# Altium PCB RX.PcbDoc
Units mil, origin at the board's own origin, x right, y up, seen from the top; angles counter-clockwise.
Board outline 1102.36 x 2007.87 mil, 2 copper layers (Top Layer, Bottom Layer); 28 components, 16 nets, 73 pads, 7 vias.
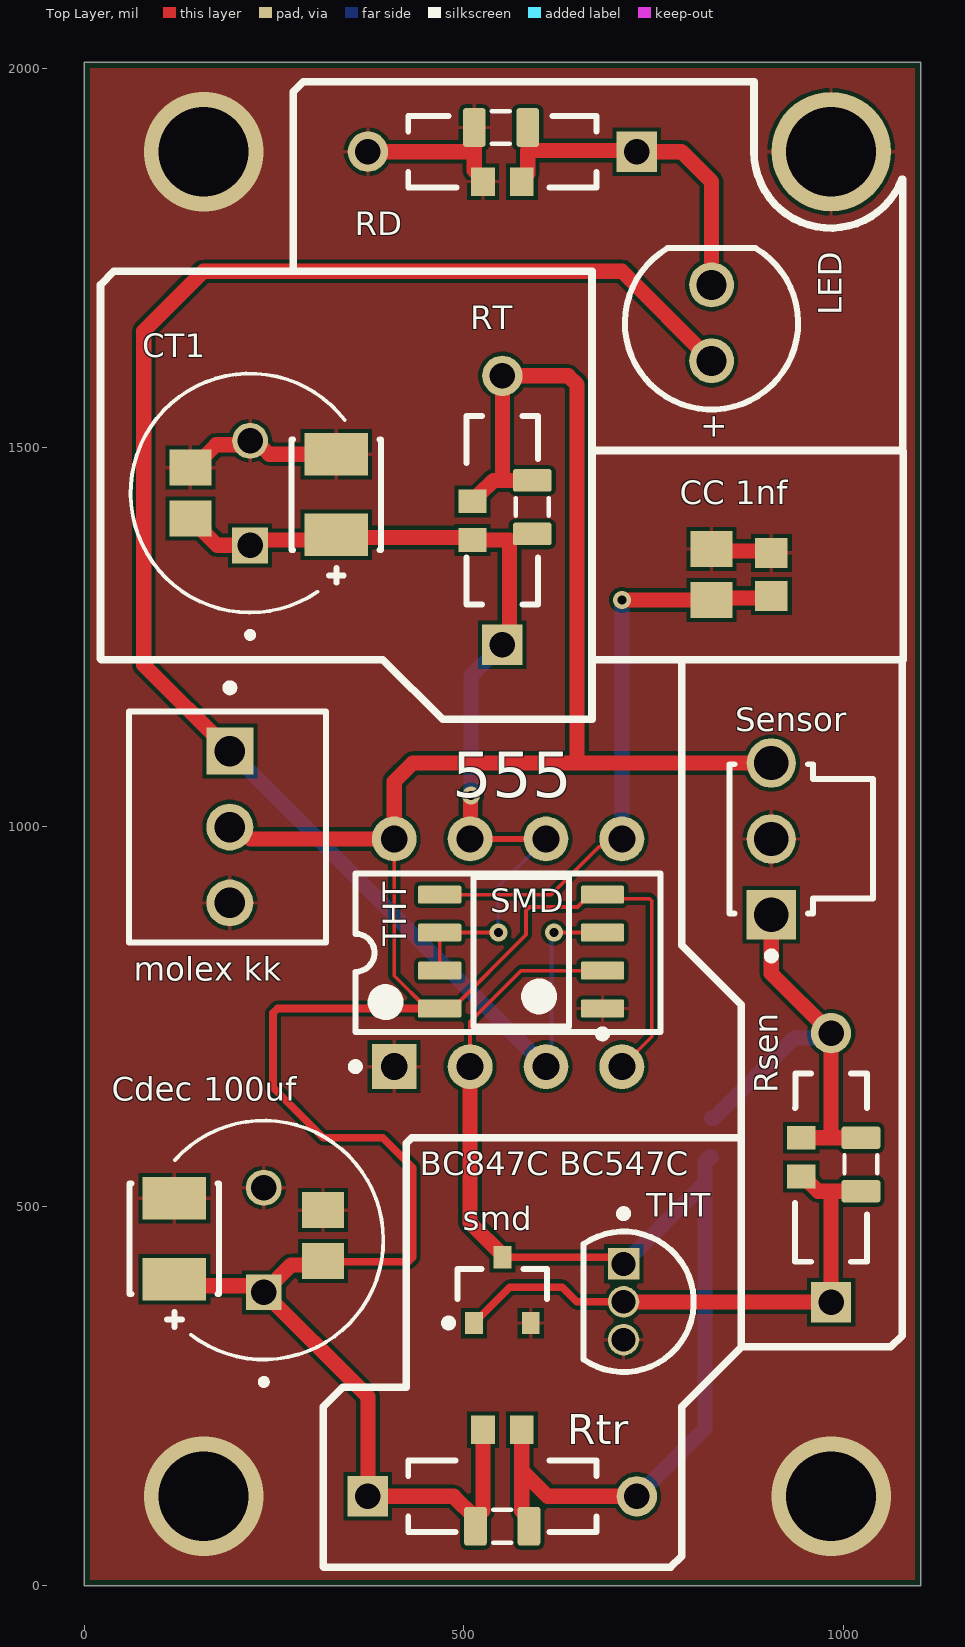
[diagram p0: Top Layer view]
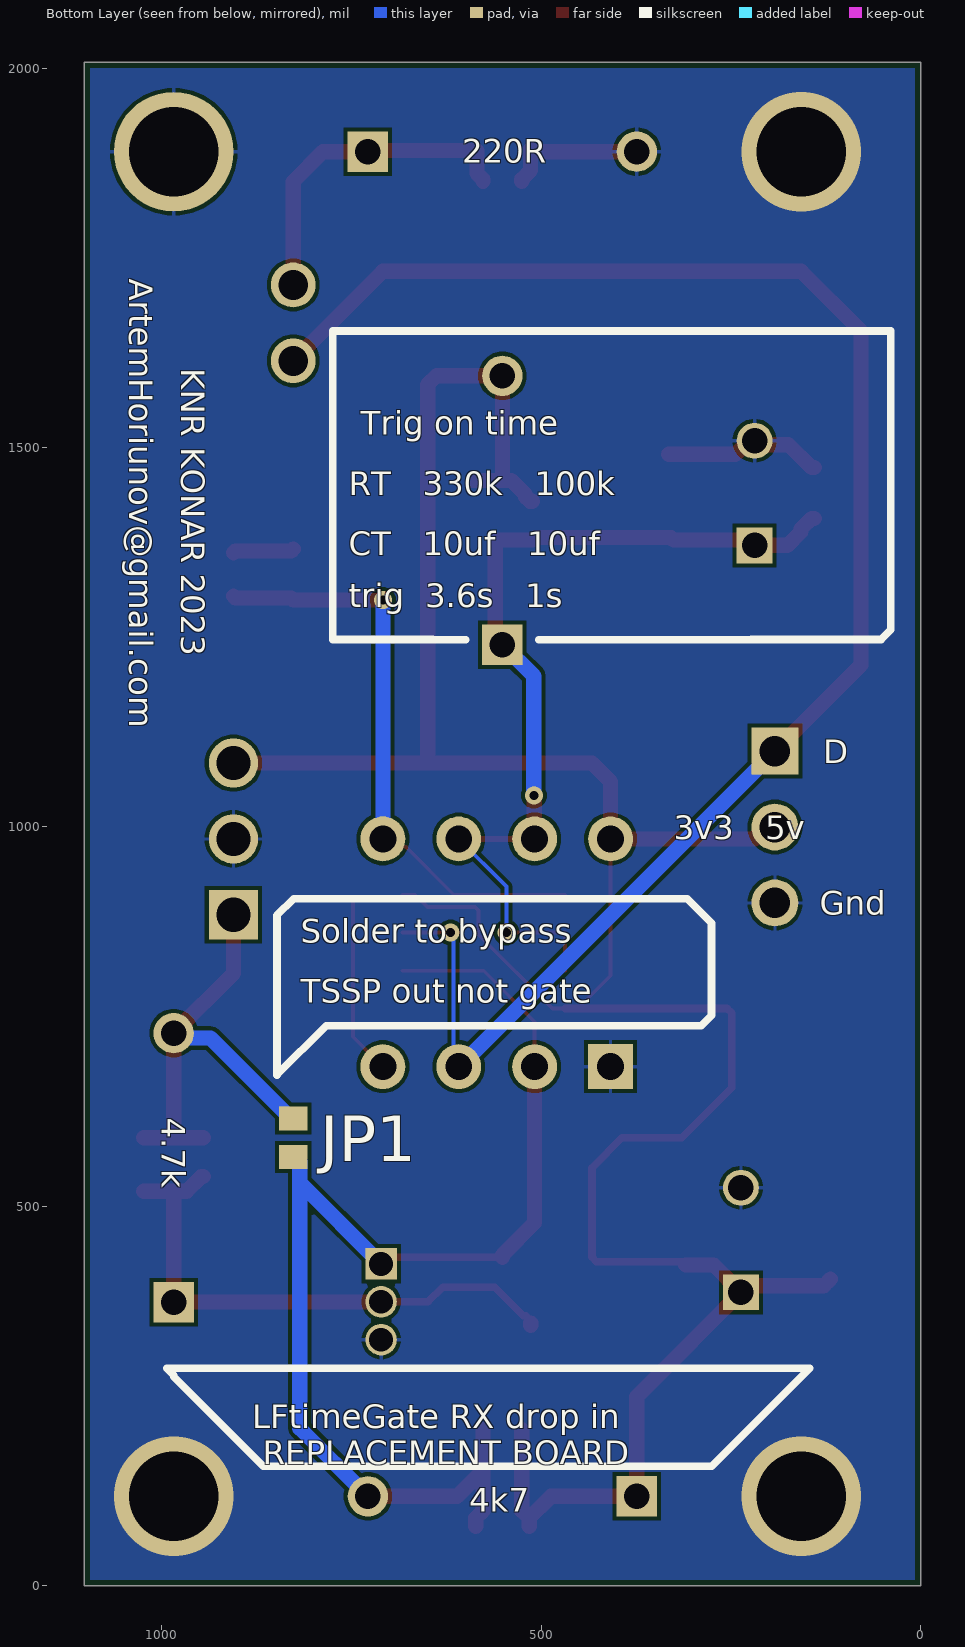
[diagram p1: Bottom Layer view, seen from below]
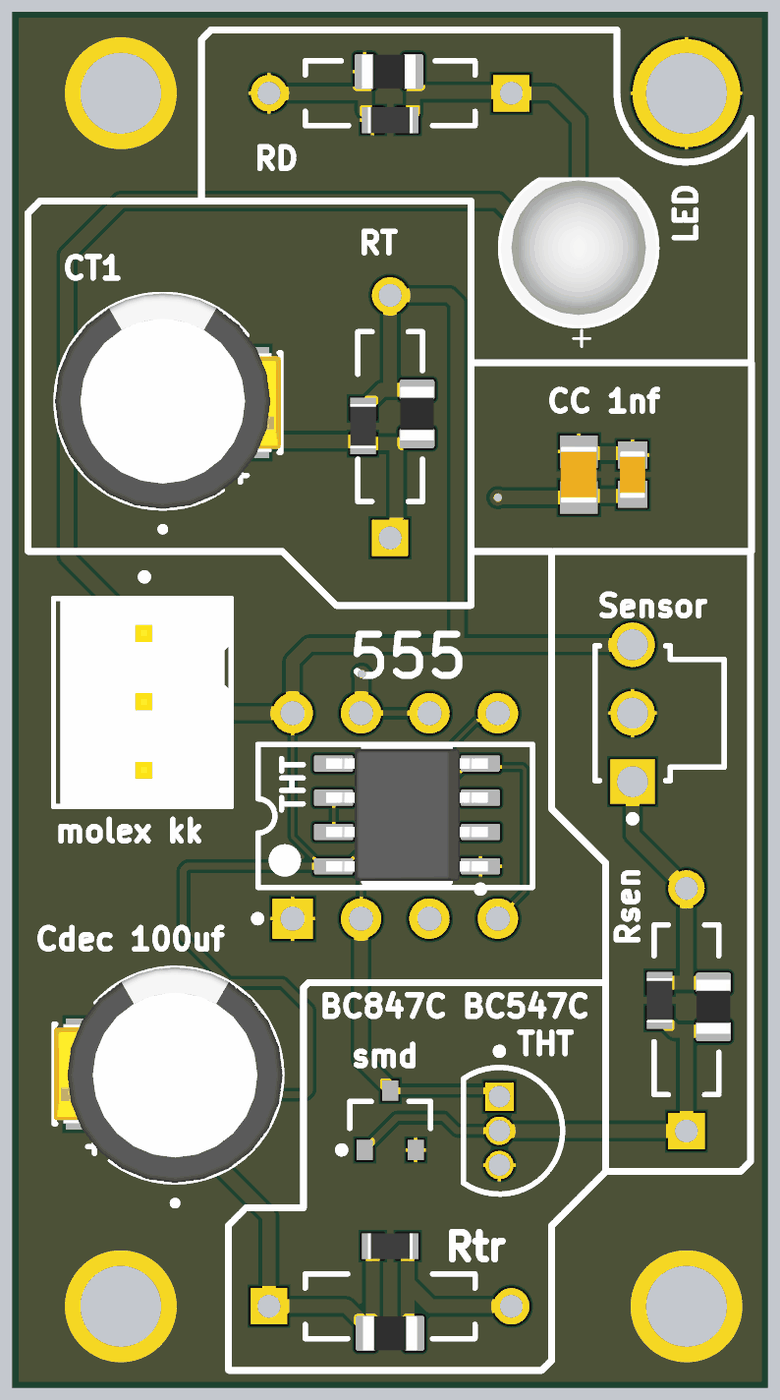
[diagram p2: 3D render of the assembled board from above, using the file's embedded part models]

## Layer stack, top to bottom
Top Solder: solder mask 0.4, Solder Resist, Dk 3.5
Top Layer: signal copper 1.4
Dielectric 1: dielectric 12.6, FR-4, Dk 4.8
Bottom Layer: signal copper 1.4
Bottom Solder: solder mask 0.4, Solder Resist, Dk 3.5

## Board outline
0,0 1102.36,0 1102.36,2007.87 0,2007.87

## Design rules (kind name [scope] priority, off if disabled: settings)
BoardOutlineClearance [All] p1: gap=7.87 ignorepadtopadclearanceinfootprint=FALSE
Clearance [All] p1: gap=5 ignorepadtopadclearanceinfootprint=FALSE except(9.84: Arc-Hole Track-Hole SMDPad-Hole THPad-Hole Via-Hole Fill-Hole Poly-Hole Region-Hole Text-Hole)
ComponentClearance [All] p1: gap=5 collisioncheckmode=3 verticalgap=5 showdistances=TRUE
DiffPairsRouting [All] p1: maxlimit=10 minlimit=5 mostfreqgap=5 toplayer_minwidth=5 toplayer_maxwidth=1000 toplayer_prefwidth=5 bottomlayer_minwidth=5 bottomlayer_maxwidth=1000 bottomlayer_prefwidth=5 maxuncoupledlength=500
Height [All] p1: minheight=0 maxheight=71497.94 prefheight=500
HoleSize [All] p1: absolutevalues=TRUE maxlimit=248.03 minlimit=11.81 maxpercent=80.000 minpercent=20.000
HoleToHoleClearance [All] p1: gap=9.84 allowstackedmicrovias=FALSE
MinimumAnnularRing [All] p1: minimumring=3
MinimumSolderMaskSliver [All] p1: minsoldermaskwidth=0
PlaneClearance [All] p1: clearance=5
PlaneConnect PlaneConnectPowerPads [InPadClass('PowerPads')] p1: planeconnectstyle=Direct reliefexpansion=20 reliefentries=4 reliefconductorwidth=10 reliefairgap=10
PlaneConnect [All] p2: pad.planeconnectstyle=Relief pad.reliefexpansion=11.81 pad.reliefentries=4 pad.reliefconductorwidth=5 pad.reliefairgap=5 via.planeconnectstyle=Direct via.reliefexpansion=11.81 via.reliefentries=4 via.reliefconductorwidth=5 via.reliefairgap=5
PolygonConnect PolygonConnectPowerPads [All vs (InPadClass('PowerPads'))] p1: connectstyle=Direct reliefconductorwidth=10 reliefentries=4 polygonreliefangle="90 Angle" airgapwidth=10
PolygonConnect [All] p2: thpad.connectstyle=Relief thpad.reliefconductorwidth=5 thpad.reliefentries=4 thpad.polygonreliefangle="90 Angle" thpad.airgapwidth=5 smdpad.connectstyle=Relief smdpad.reliefconductorwidth=5 smdpad.reliefentries=4 smdpad.polygonreliefangle="90 Angle" smdpad.airgapwidth=5 via.connectstyle=Direct via.reliefconductorwidth=5 via.reliefentries=4 via.polygonreliefangle="90 Angle" via.airgapwidth=5
RoutingVias [All] p1: holewidth=11.81 width=23.62 viastyle="Through Hole" minholewidth=11.81 minwidth=23.62 maxholewidth=23.62 maxwidth=259.84
SilkToSilkClearance [All] p1: silktosilkclearance=0
SilkToSolderMaskClearance [IsPad] p1: minsilkscreentomaskgap=5 clearancetoexposedcopper=TRUE
SolderMaskExpansion [All] p1: expansion=2.95 istentingtop=FALSE
Width [All] p1: maxlimit=1000 minlimit=5 preferedwidth=5 minimp=50.000000 maximp=50.000000 favimp=50.000000
20 further rules are at their usual default settings.

## Classes and differential pairs
component class RX: CT1 Sensor SMD

## Components (designator, comment, footprint, x,y, rotation, side; value= is the part's Value field where it differs from the comment)
CC2 "Capacitor 1 uF +/- 10% 50 V 0805" CAPC2013X135X45NL10T25 826.77,1332.68 r270 top value=0805
"CC 1nf" "Capacitor 1uF +/- 10% 16V 0603" CAPC1608X90X35ML15T15 905.51,1332.68 r270 top value=0603 (schematic designator CC1)
Cdec2 "Tantal" FP-T491B107K006AT-MFG 119.05,457.5 r270 top
Cdec3 "EEUFR1V101" CAPPRD350W60D800H1150 236.84,455.79 r90 top
"Cdec 100uf" "Capacitor 1 uF +/- 10% 50 V 0805" CAPC2013X135X45NL10T25 314.96,461.69 r270 top value=1µF (schematic designator Cdec1)
CT1 "Electrolythic" CAPPRD350W60D800H1150 218.82,1440.01 r90 top
CT2 "Tantal" FP-T491B107K006AT-MFG 332.36,1437.95 r270 top
CT3 "Capacitor 1 uF +/- 10% 50 V 0805" CAPC2013X135X45NL10T25 140.08,1440.01 r270 top value=1µF
JP1 "0603" RESC1609X50X30NL8T20 826.77,590.55 r90 bottom (schematic designator Rbyp)
LED "151053YS04500" WL-TMRW_D5.8H11.7 826.77,1664.2 r90 top (schematic designator D?)
"molex kk" "22-11-2032" FP-22-11-2032-MFG 189.13,999.93 r270 top (schematic designator J1)
RD "1KR5J" RESC0805(2012)_L 549.2,1921.59 r180 top value=0805 (schematic designator RD1)
RD2 "0603" RESC1609X50X30NL8T20 551.18,1850.39 r180 top
RD3 "MFR-25FBF52-10K" RESA60-630X240 551.18,1889.76 r180 top value=tht
Rsen "0603" RESC1609X50X30NL8T20 944.88,564.96 r90 top (schematic designator Rsen2)
Rsen1 "MFR-25FBF52-10K" RESA60-630X240 984.25,551.18 r90 top value=10k
Rsen3 "1KR5J" RESC0805(2012)_L 1023.62,555.51 r90 top value=0805
RT "MFR-25FBF52-10K" RESA60-630X240 551.18,1417.32 r90 top value=10k (schematic designator RT3)
RT1 "1KR5J" RESC0805(2012)_L 590.55,1421.65 r90 top value=0805
RT2 "0603" RESC1609X50X30NL8T20 511.81,1403.54 r90 top
Rtr "1KR5J" RESC0805(2012)_L 551.18,78.74 r0 top value=0805 (schematic designator Rtr1)
Rtr2 "MFR-25FBF52-10K" RESA60-630X240 551.18,118.11 r0 top value=10k
Rtr3 "0603" RESC1609X50X30NL8T20 551.18,205.8 r0 top
Sensor "TSOP38238" VISH-TSOP38238 905.51,984.25 r90 top
smd "BC847C" INF-SOT23_L 551.18,389.76 r90 top (schematic designator TRsmd)
SMD "NE555DR" D0008A_N 575.83,835.81 r180 top
THT "NE555P" P0008A 558.66,834.25 r90 top
THT "BC547CG" ONSC-TO-92-3-29-11 710.87,374.42 r270 top (schematic designator TRtht)

## Footprints (in the part's own frame and the unit in brackets; to place one, negate y for a bottom-side part, rotate by r counter-clockwise, add the part's x,y. Pads: shape width x height; smd on the part's side, far side on the other; paste and mask are expansions set on the pad)
CAPC1608X90X35ML15T15 [mm] "Chip Capacitor, 2-Leads, Body 1.75x0.95mm, IPC Low Density"
  rect 1x1.1 smd: 1(-0.725,0) 2(0.725,0)
  body extent -0.87,-0.48 0.87,0.48, height 0.9
CAPC2013X135X45NL10T25 [mm] "Chip Capacitor, 2-Leads, Body 2.10x1.35mm, IPC Medium Density"
  rect 1.2x1.4 smd: 1(-0.85,0) 2(0.85,0)
  body extent -1.05,-0.67 1.05,0.67, height 1.35
CAPPRD350W60D800H1150 [mm]
  round 1.2 hole 0.85: N(1.75,0)
  rect 1.2x1.2 hole 0.85: P(-1.75,0)
  silkscreen extent -4.85,-4 4,2.97, body extent -4,-4 4,4, height 11.5
D0008A_N [mm] "SOIC, 8-Leads, Body 5x4mm, Pitch 1.27mm, IPC Medium Density"
  rrect17% 1.45x0.6 smd: 1(-2.725,1.905) 2(-2.725,0.635) 3(-2.725,-0.635) 4(-2.725,-1.905) 5(2.725,-1.905) 6(2.725,-0.635) 7(2.725,0.635) 8(2.725,1.905)
  silkscreen extent -2.85,-2.5 1.6,2.88, body extent -3,-2.45 3,2.45, height 1.63
FP-22-11-2032-MFG [mm]
  rect 1.57x1.57 hole 1.02 paste-2539.97 mask+0: 1(-2.54,0.075)
  round 1.57 hole 1.02 paste-2539.97 mask+0: 2(0,0.075) 3(2.54,0.075)
  silkscreen extent -4.78,-3.3 3.86,3.3, body extent -3.96,-3.4 3.96,3.4, height 0.25
FP-T491B107K006AT-MFG [mm]
  rect 1.42x2.13 smd paste+0 mask+0: 1(-1.35,0) 2(1.35,0)
  silkscreen extent -1.85,-1.5 2.95,1.5, body extent -2.18,-1.62 2.18,1.62, height 0.25
INF-SOT23_L [mm] "SOT23, 3-Leads, Body 2.9x1.3 mm, Pitch 0.95 mm, IPC High Density"
  rect 0.75x0.6 smd: 1(-1.1,0.95) 2(-1.1,-0.95) 3(1.1,0)
  silkscreen extent -1.22,-1.5 0.7,1.92, body extent -0.7,-1.5 0.7,1.5, height 1.1
ONSC-TO-92-3-29-11 [mm] "TO, 3-Leads, Body Dia 4.7mm, Pitch 1.27mm"
  rect 1.05x1.05 hole 0.8: 1(-1.27,0)
  round 1.05 hole 0.8: 2(0,0) 3(1.27,0)
  silkscreen extent -3.07,-1.34 2.35,2.35, body extent -2.35,-1.33 2.36,2.36, height 7.87
P0008A [mm] "DIP, 8-Leads, Body 10.15x6.6mm, Pitch 2.54mm"
  rect 1.5x1.5 hole 0.9: 1(-3.81,3.81)
  round 1.5 hole 0.9: 2(-3.81,1.27) 3(-3.81,-1.27) 4(-3.81,-3.81) 5(3.81,-3.81) 6(3.81,-1.27) 7(3.81,1.27) 8(3.81,3.81)
  silkscreen extent -3.93,-5.1 2.65,5.23, body extent -3.95,-5.07 3.95,5.07, height 5.08
RESA60-630X240 [mm] "Axial Resistor, 2-Leads, Dia 2.4mm, Body Length 6.3mm"
  rect 1.35x1.35 hole 0.85: 1(-4.5,0)
  round 1.35 hole 0.85: 2(4.5,0)
  silkscreen extent -3.15,-1.2 3.15,1.2, body extent -4.77,-1.19 4.77,1.2, height 2.4
RESC0805(2012)_L [mm] "Chip Resistor, Body 2.0x1.3mm, IPC High Density"
  rrect25% 0.76x1.3 smd: 1(-0.9,0) 2(0.89,0)
  silkscreen extent -0.3,-0.55 0.3,0.55, body extent -1,-0.62 1,0.63, height 0.6
RESC1609X50X30NL8T20 [mm] "Chip Resistor, 2-Leads, Body 1.65x0.95mm, IPC Medium Density"
  rect 0.8x0.95 smd: 1(-0.65,0) 2(0.65,0)
  body extent -0.82,-0.48 0.82,0.48, height 0.5
VISH-TSOP38238 [mm] "TH, 3-Leads, Body 5.00x4.80mm, Pitch 2.54mm"
  rect 1.65x1.65 hole 1.15: 1(-2.54,0)
  round 1.65 hole 1.15: 2(0,0) 3(2.54,0)
  silkscreen extent -4.04,-3.4 2.5,1.4, body extent -2.89,-3.4 2.89,1.4, height 8.55
WL-TMRW_D5.8H11.7 [mm] "THT Mono-color Round LED, 2-leads"
  round 1.5 hole 1: 1(1.27,0) 2(-1.27,0)
  silkscreen extent -2.9,-2.9 2.5,2.9, body extent -2.9,-2.9 2.5,2.9, height 11.7

## Part data
CC2 "Cdec 100uf" CT3: library part CMP-001-00007-6, "Chip Capacitor, 1 uF, +/- 10%, 50 V, 0805 (2012 Metric)", Capacitor Type=Ceramic, Case/Package=0805, Max Operating Temperature=125°C, Min Operating Temperature=-55°C, Tolerance=10%, Voltage rating=50V, Mounting Technology=SM, Pins=2, RoHS Compliant=True
"CC 1nf": library part CMP-001-00004-6, "Chip Capacitor, 1 uF, +/- 10%, 16 V, 0603 (1608 Metric)", Capacitor Type=Ceramic, Case/Package=0603, Max Operating Temperature=125°C, Min Operating Temperature=-55°C, Tolerance=10%, Voltage rating=16V, Mounting Technology=SM, Pins=2, RoHS Compliant=True
Cdec2 CT2: library part CMP-03017-000031-1, "CAP TANT 100UF 10% 6.3V 1411", Capacitance=100uF, Case Code (Imperial)=1411, Case Code (Metric)=3528, Dielectric Material=Tantalum, ESR (Equivalent Series Resistance)=3R, Leakage Current=6.3uA, Max Operating Temperature=125°C, Min Operating Temperature=-55°C, Package Quantity=1, Tolerance=10%, Voltage=6.3V, Voltage Rating (DC)=6V, Case/Package=1411, Depth=2.8mm, Dissipation Factor=15%, Failure Rate=0.001%, Features="General Purpose", Height=1.9mm, Height - Seated (Max)=0.083inch, Lead Free="Lead Free", Length=3.5mm, Life (Hours)=2000Hour, Mount="Surface Mount", Number of Pins=2, Packaging="Tape and Reel", Polarity=Polar, Radiation Hardening=No, REACH SVHC="No SVHC", RoHS Compliant=Yes, Termination=SMD/SMT, Voltage rating=6.3V, Width=2.8mm
Cdec3: "Aluminium Electrolytic Capacitor, Fr Series, 100 - F, - 20%, 35 V, 8 Mm, Radial Leaded", Package="RADIAL-2 Panasonic", Availability="In Stock", Check_prices=https://www.snapeda.com/parts/EEUFR1V101/Panasonic/view-part/2780939/?ref=eda, MF=Panasonic, MP=EEUFR1V101, Price=None, SnapEDA_Link=https://www.snapeda.com/parts/EEUFR1V101/Panasonic/view-part/2780939/?ref=snap
CT1: library part EEUFR1V101, "Aluminium Electrolytic Capacitor, Fr Series, 100 - F, - 20%, 35 V, 8 Mm, Radial Leaded", Package="RADIAL-2 Panasonic", Availability="In Stock", Check_prices=https://www.snapeda.com/parts/EEUFR1V101/Panasonic/view-part/2780939/?ref=eda, MF=Panasonic, MP=EEUFR1V101, Price=None, SnapEDA_Link=https://www.snapeda.com/parts/EEUFR1V101/Panasonic/view-part/2780939/?ref=snap
JP1 RD2 Rsen RT2 Rtr3: library part CMP-2000-03816-5, "Chip Resistor, 0 Ohm, Jumper, 100 mW, -55 to 155 degC, 0603 (1608 Metric), RoHS, Tape and Reel", Manufacturer="Vishay Semiconductor", Max Operating Temperature="155 degC", Min Operating Temperature="-55 degC", Package Quantity=5000, Voltage rating="75 V", ComponentLink1Description="Manufacturer URL", ComponentLink1URL=http://www.vishay.com/, ComponentLink2Description=Datasheet, ComponentLink2URL=http://www.vishay.com/docs/20035/dcrcwe3.pdf, DatasheetVersion=06/2012, Height="0.45 mm", Length="1.55 mm", Mount="Surface Mount", Mounting Technology="Surface Mount", PackageDescription="2-Pin Surface Mount Device, Body 1.575 x 0.85 mm", PackageReference=0603, Packaging="Tape and Reel", Pins=2, REACH SVHC=Unknown, RoHSCompliant=true
LED: library part CMP-1477-00001-2, Case/Package=Radial, Color=Yellow, Forward Current=100mA, Forward Voltage=2.1V, Max Operating Temperature=85°C, Max Reverse Voltage (DC)=5V, Min Operating Temperature=-40°C, Test Current=20mA, Dominant Wavelength=590nm, Height=8.6mm, Length=5mm, Lens Size=5mm, Lens Style="Circular, Clear, Round", Luminous Intensity=1.5cd, Mount="Through Hole", NexarPartId=29717819, Packaging=Bulk, Peak Wavelength=592nm, REACH SVHC=Unknown, RoHS=Compliant, Viewing Angle=45°, Wavelength=590nm, Width=5mm
"molex kk": library part CMP-04776-000113-1, "CONN HEADER VERT 3POS 2.54MM", Current rating=4A, Manufacturer=Molex, Temperature="-40°C to +80°C", Temperature Range High=+80°C, Temperature Range Low=-40°C, Voltage rating=500V, Automotive=No, Category=Conn, ComponentLink2Description=Datasheet, ComponentLink2URL=https://www.molex.com/webdocs/datasheets/pdf/en-us/0022112032_PCB_HEADERS.pdf, Conn Gender=Male, Conn Orientation=Vertical, Contact material=Gold,Nickel, Device Class L1=Connectors, Device Class L2="Headers and Wire Housings", Device Class L3=unset, Digikey Description="CONN HEADER VERT 3POS 2.54MM", Footprint Url=https://www.molex.com/pdm_docs/sd/022112032_sd.pdf, Height=10.91mm, Lead Free=Yes, Manufacturer Part Number=22-11-2032, Mounting Type="Through Hole", Mouser Description="KK® 254 Solid Header, Vertical, with Friction Lock, 3 Circuits, Gold (Au) Plating", Number of Contacts=3, Number of Rows=1, Octopart=https://octopart.com/22-11-2032-molex-10085, Package=22-11-2032, Pitch=2.54mm, RoHS=TRUE
RD Rsen3 RT1 Rtr: library part CMP-009-00076-2, "1K 0.125W 5% 0805 (2012 Metric)  SMD", Case/Package=0805, Power=125mW, Tolerance=5%, Mounting Technology=SMT, Pins=2
RD3 Rsen1 RT Rtr2: library part CMP-009-00047-4, "Axial Resistor, 10 KOhm, +/- 1%, 0.25 W, -55 to 155 degC, 2-Pin THD, RoHS, Bulk", Case/Package=Axial, Manufacturer=Yageo, Max Operating Temperature=155°C, Min Operating Temperature=-55°C, Package Description="2-Pin Axial Lead, Dia 2.4 mm, Body Length 6.3 mm", Package Quantity=200, Package Reference=MFR-25, Power=250mW, Tolerance=1%, Voltage rating=250V, Datasheet URL=http://www.yageo.com/documents/recent/Yageo%20LR_MFR_2013.pdf, Datasheet Version=Apr-13, Manufacturer URL=http://www.yageo.com/, Mounting Technology=TH, Packaging=Bulk, RoHS Compliant=True
Sensor: library part CMP-010-00018-3, "IR Receiver Modules for Remote Control System, 2.5 to 5.5 V, -25 to 85 degC, 3-Pin THD, RoHS, Bulk", Case/Package=Axial, Manufacturer="Vishay Semiconductor", Max Operating Temperature=85°C, Max Supply Voltage=5.5V, Min Operating Temperature=-25°C, Min Supply Voltage=2.5V, Nominal Supply Current=3mA, Output Current=5mA, Package Description="3-Pin Through Hole Device, Body 5.00 x 4.80 mm, Pitch 2.54 mm", Package Quantity=1500, Datasheet URL=http://www.vishay.com/docs/82491/tsop382.pdf, Datasheet Version="Rev. 1.5, 07/2016", Mounting Technology=TH, Package Reference=TSOP38238, Packaging=Bulk, Pins=3, RoHS Compliant=True, Sensor Type=Optical
smd: library part CMP-1177-00037-1, "NPN Silicon AF Transistor, 45 V VCEO, 100 mA IC, SOT23, Reel, Green", Manufacturer=Infineon, ComponentLink1Description="Manufacturer URL", ComponentLink1URL=http://www.infineon.com/, ComponentLink2Description=Datasheet, ComponentLink2URL=http://www.infineon.com/dgdl/bc847series_bc848series_bc849series_bc850series.pdf?folderId=db3a304314dca389011541d30fa21656&fileId=db3a304314dca389011541d4630a1657, ComponentLink3Description="Package Specification", ComponentLink3URL=http://www.infineon.com/dgdl/SOT23-Package_Overview.pdf?folderId=db3a30431936bc4b0119532290053c66&fileId=db3a30431936bc4b0119533468123c85, fT (typ)="250Â MHz", Green=TRUE, IBM (max)="200Â mA", IC (max)="100Â mA", ICBO (max)="15Â nA", ICM (max)="200Â mA", Mounting Technology="Surface Mount", PackageDescription="3-Pin Small Outline Transistor Package, 1.3 x 2.9 mm Body, 0.95 mm Pitch", PackageReference=SOT23, PackageVersion=Apr-08, Packing=Reel, PartNumber=BC847C, Polarity=NPN, Ptot (max)="330Â mW", VCBO (max)="50Â V", VCEO (max)="45Â V", VEBO (max)="6Â V"
SMD: library part CMP-016-00007-3, "Precision Timer, 4.5 to 16 V, 0 to 70 degC, 8-Pin SOIC (D), Green (RoHS & no Sb/Br), Tape and Reel", Case/Package=SOIC, Frequency=100kHz, Manufacturer="Texas Instruments", Max Operating Temperature=70°C, Max Ouput Current=-200mA, Max Supply Voltage=16V, Min Operating Temperature=0°C, Min Supply Voltage=4.5V, Package Description="8-Pin Small Outline Integrated Circuit, Body 4.9 x 3.9 mm, Pitch 1.27 mm", Package Quantity=2500, Package Reference=D0008A, Package Version="4040047-3/M, 06/2011", Datasheet URL=http://www.ti.com/general/docs/lit/getliterature.tsp?genericPartNumber=NE555&fileType=pdf, Datasheet Version="SLFS022I, 09/2014", Manufacturer URL=http://www.ti.com/, Mounting Technology=SM, Package URL=http://www.ti.com/lit/ml/msoi002j/msoi002j.pdf, Packaging=TapeandReel, Pins=8, RoHS Compliant=True
THT: library part CMP-2000-04954-1, "Precision Timer, 4.5 to 16 V, 0 to 70 degC, 8-Pin DIP, Pb-Free, Tube", Manufacturer=TexasInstruments, Maximum High Level Output Current=-200mA, Maximum Low Level Output Current=200mA, Operating Supply Voltage=5, Package=8PDIP, Package Description="8-Pin Double In-line Package, Body 9.59 x 6.35 mm, Pitch 2.54 mm", Package Reference=P8, Category=Timer, Datasheet URL=http://www.ti.com/general/docs/lit/getliterature.tsp?genericPartNumber=NE555&fileType=pdf, Datasheet Version="Rev. I, 09/2014", Manufacturer URL=http://www.ti.com/, Number of Internal Timers=1, Package URL=http://www.ti.com/lit/ml/mpdi001b/mpdi001b.pdf, Packaging=Rail/Tube, Rad Hard=No, Type=Standard
THT: library part CMP-1048-01464-1, "Amplifier Transistor, NPN Silicon, 3-Pin TO-92, Pb-Free, Bulk Box", Manufacturer="On Semiconductor", ComponentLink1Description="Manufacturer URL", ComponentLink1URL=http://www.onsemi.com/, ComponentLink2Description=Datasheet, ComponentLink2URL=http://www.onsemi.com/pub_link/Collateral/BC546-D.PDF, ComponentLink3Description="Package Specification", ComponentLink3URL=http://www.onsemi.cn/pub_link/Collateral/2N6426-D.PDF, DatasheetVersion="Rev. 7", fT Min (MHz)=150, IC Continuous (A)=0.1, Mounting Technology="Through Hole", PackageDescription="3-Pin Transistor Outline, Body 4.825 x 3.685 mm, Pitch 1.27 mm", PackageReference=TO-92-3-29-11_AM_SL, PackageVersion="Rev. AM", Packing="Bulk Box", PartNumber=BC547CG, Polarity=NPN, RoHS=TRUE

## Free pads (board coordinates)
  round 157.48 hole 118.11: 2(984.25,1889.76)

## Via types
v1: diameter 23.62, hole 11.81, Top Layer to Bottom Layer, 4 vias
v2: diameter 157.48, hole 118.11, Top Layer to Bottom Layer, 3 vias

## Nets (pads, with @x,y where several pads share a name; then routed paths per layer and width w, separated by ;. In a path a pad name is that pad's centre, name@x,y a point inside that pad or via, vN(x,y) a via of type N, cw(c..) or ccw(c..) an arc to the next point about the centre after c; other vN are vias at no path point)
+5: "Cdec 100uf.2" "molex kk.2" Cdec2.2 Cdec3.P RT1.2 RT2.2 RT.2 Rtr2.1 Rtr3.1 Rtr.1 Sensor.3 SMD.4 SMD.8 THT.4 THT.8 | length 4093.7
  Top Layer w5: THT.8 408.66,803.97 SMD.8@451.82,760.81 ; SMD.8 485.28,760.81 582.47,857.99 582.47,889.79 587.1,894.43 650,894.43 666.39,910.81 SMD.4 688.41,905.51 745.1,905.51 748.03,902.58 748.03,723.62 THT.4
  Top Layer w10: 309.48,422.75 313.94,427.21 427.21,427.21 433.07,433.07 433.07,551.18 393.7,590.55 314.96,590.55 249,656.51 249,754.95 254.86,760.81 451.82,760.81 SMD.8
  Top Layer w20: Cdec2.2 127.78,395.62 228.11,395.62 374.02,249.72 Rtr2.1 487.01,118.11 Rtr.1@515.75,89.37 ; 192.08,999.93 203.4,999.93 219.07,984.25 THT.8 408.66,1059.84 433.07,1084.25 Sensor.3 ; Cdec3.P 272.7,422.75 309.48,422.75 ; RT2.2 514.76,1429.13 520.51,1434.88 520.51,1437.83 539.37,1456.69 551.18,1456.69 ; Rtr.1 Rtr.1@515.75,89.37 ; Rtr3.1 525.59,99.21 Rtr.1@515.75,89.37 ; RT1.2 551.18,1456.69 ; 648.73,1084.65 649.61,1085.53 649.61,1582.77 637.89,1594.49 RT.2 551.18,1456.69
GND: "CC 1nf.1" "Cdec 100uf.1" "molex kk.3" CC2.1 Cdec2.1 Cdec3.N CT1.N CT2.1 CT3.1 pad.2 RD2.2 RD3.2 RD.2 Sensor.2 SMD.1 smd.2 THT.1@408.66,684.25 THT.3@710.87,324.42 | length 484.2
  Top Layer w20: CT3.1 144.02,1473.47 174.24,1503.69 213.61,1503.69 CT1.N 226.2,1508.91 244.01,1491.09 CT2.1 ; RD3.2 510.73,1889.76 514.16,1893.19 514.16,1864.78 525.59,1853.35 RD2.2 ; CC2.1 829.23,1363.68 903.05,1363.68 905.51,1361.22
  other v2: 157.48,118.11 984.25,118.11 157.48,1889.76
NetCC1_2: "CC 1nf.2" CC2.2 SMD.5 THT.5 | length 784.4
  Top Layer w5: SMD.5 615.19,910.81 678.29,973.91 698.32,973.91 THT.5
  Top Layer w20: v1(708.66,1299.21) CC2.2 829.23,1301.67 903.05,1301.67 905.51,1304.13
  Bottom Layer w20: THT.5 v1(708.66,1299.21)
NetCC11_2: 
NetCT1_P: CT1.P CT2.2 CT3.2 RT1.1 RT2.1 RT.1 SMD.6 SMD.7 THT.6 THT.7 | length 1235
  Top Layer w5: SMD.7 SMD.6 v1(545.85,860.81)
  Top Layer w7.87: THT.7 THT.6
  Top Layer w20: CT3.2 144.02,1406.54 157.64,1392.92 157.64,1388.98 175.52,1371.11 CT1.P 225.67,1377.95 325.51,1377.95 328.94,1381.37 508.39,1381.37 RT2.1 560.51,1377.95 560.51,1249.49 RT.1 ; THT.7 509.2,984.79 509.2,1041.07 v1(509.75,1041.61)
  Bottom Layer w5: v1(545.85,860.81) 545.85,921.44 THT.6
  Bottom Layer w20: v1(509.75,1041.61) 509.75,1198.72 RT.1
NetD?_1: LED.1 RD2.1 RD3.1 RD.1 | length 439.6
  Top Layer w20: RD2.1 576.77,1853.35 584.63,1861.2 584.63,1891.4 726.71,1891.4 RD3.1 787.4,1889.76 826.77,1850.4 LED.1
NetD?_2: "molex kk.1" LED.2 SMD.3 THT.3@608.66,684.25 | length 2263.7
  Top Layer w5: v1(619.29,860.81) SMD.3
  Top Layer w20: 192.08,1099.93 78.74,1213.27 78.74,1653.54 157.48,1732.28 708.69,1732.28 LED.2
  Bottom Layer w5: THT.3@608.66,684.25 615.73,691.32 615.73,857.25 v1(619.29,860.81)
  Bottom Layer w20: 192.08,1099.93 607.76,684.25 THT.3@608.66,684.25
NetDS?_1: 
NetJ2_2: 
NetRbyp_1: JP1.1 Rtr2.2 Rtr3.2 Rtr.2 SMD.2 smd.3 THT.1@710.87,424.42 THT.2@508.66,684.25 | length 1630.9
  Top Layer w5: THT.2@508.66,684.25 508.66,743.47 575.72,810.53 SMD.2@682.84,810.53
  Top Layer w10: smd.3 702.22,433.07 THT.1@710.87,424.42
  Top Layer w20: THT.2@508.66,684.25 508.66,478.54 551.18,436.02 smd.3 ; Rtr3.2 576.77,152.31 ; Rtr.2 586.22,89.37 576.77,98.82 576.77,152.31 ; Rtr2.2 610.97,118.11 576.77,152.31
  Bottom Layer w20: THT.1@710.87,424.42 818.07,531.62 ; Rtr2.2 818.07,207.83 818.07,531.62 ; JP1.1 823.82,564.96 818.07,559.21 818.07,531.62
NetRbyp_2: JP1.2 Rsen1.2 Rsen3.2 Rsen.2 Sensor.1 | length 609
  Top Layer w20: Sensor.1 905.51,807.09 Rsen1.2 984.25,590.55 ; Rsen.2 984.25,590.55 ; Rsen3.2 984.25,590.55
  Bottom Layer w20: JP1.2 829.72,616.14 935.59,722 977.91,722 Rsen1.2
NetRD11_2: 
NetRsen1_1: Rsen1.1 Rsen3.1 Rsen.1 smd.1 THT.2@710.87,374.42 | length 735.7
  Top Layer w10: smd.1 513.78,349.41 520.59,356.22 523.54,356.22 561.02,393.7 629.92,393.7 649.2,374.42 THT.2@710.87,374.42
  Top Layer w20: smd.1@513.78,343.5 smd.1 ; THT.2@710.87,374.42 711.08,374.22 984.05,374.22 Rsen1.1 984.25,520.08 ; Rsen.1 947.83,539.37 967.13,520.08 984.25,520.08 ; Rsen3.1 984.25,520.08
NetRT11_1: 
NetRT21_1: 
NetRT22_1: 

## Polygon pours and split planes (outlines as drawn)
GND on Bottom Layer "GND_L02_P002" (solid, pour order 2): 0,2007.87 1102.36,2007.87 1102.36,0 0,0
GND on Top Layer "GND_L01_P003" (solid, pour order 3): 0,2007.87 1102.36,2007.87 1102.36,0 0,0

## Silkscreen, mask and mechanical layers (free items; w line width, h text height)
Top Overlay:
  lines w7.87: 427.17,1842.52 490.44,1842.52 ; 427.17,1937.01 479.92,1937.01 ; 613.25,1842.52 675.2,1842.52 ; 617.11,1937.01 675.2,1937.01
  lines w10: 275.59,1732.28 275.59,1968.5 289.04,1981.95 882.56,1981.95 882.68,1981.83 882.68,1889.8 ccw(c983.65,1890.01) 1077.66,1853.18 ; 669.29,1220.47 787.4,1220.47 ; 669.29,1496.06 1078.46,1496.06 ; 866.22,315.04 1063.07,315.04 1077.91,329.88 1077.91,1219 1079.39,1220.47 ; 866.3,314.96 866.14,315.12 866.14,590.55 ; 866.3,315.12 787.4,236.22 787.4,39.37 772.69,24.66 315.62,24.66 314.96,25.32 314.96,236.22 340.69,261.95 424.39,261.95 424.39,583.34 431.6,590.55 866.14,590.55 ; 1078.46,1853.18 1078.46,1496.06 ; 787.4,1220.47 1079.39,1220.47 ; 787.4,1220.47 787.4,844.33 866.14,765.59 866.14,590.55 ; 1078.46,1496.06 1079.39,1495.13 1079.39,1220.47 ; 21.74,1221.77 21.74,1714.65 39.37,1732.28 551.18,1732.28 669.29,1732.28 669.29,1141.73 472.44,1141.73 393.7,1220.47 23.04,1220.47 21.74,1221.77
  text "555" at 484.95,1039.2 h60
  text "BC847C BC547C" at 442.42,541.13 h31.5
Bottom Overlay:
  lines w10: 503.5,1246.85 223.42,1247.04 52.17,1247.04 39.37,1259.84 39.37,1299.21 39.37,1574.8 39.37,1653.54 774.6,1653.54 774.6,1247.04 ; 599.29,1246.85 642.91,1246.85 642.73,1247.04 774.6,1247.04 ; 774.6,1571.42 774.6,1247.04 ; 848.17,673.25 848.17,883.39 826.05,905.51 307.7,905.51 275.59,873.41 275.59,751.83 289.18,738.25 745.01,738.25 783.48,738.25 848.17,673.56 ; 146.13,286.76 993.15,286.76 984.25,277.87 984.25,275.59 866.14,157.48 314.96,157.48 275.59,157.48 157.48,275.59 157.3,275.59 146.13,286.76
  text "220R" at 603.98,1875.31 h31.5
  text "ArtemHoriunov@gmail.com" at 1042.5,1722.28 h31.5 r90
  text "KNR KONAR 2023" at 974.25,1604.17 h31.5 r90
  text "Trig on time" at 738.03,1516.56 h31.5
  text "RT   330k   100k" at 753.45,1436.78 h31.5
  text "CT   10uf   10uf" at 753.45,1358.04 h31.5
  text "trig  3.6s   1s" at 753.45,1289.8 h31.5
  text "D" at 128.48,1083.91 h31.5
  text "3v3   5v" at 325.66,983.58 h31.5
  text "Gnd" at 132.85,884.12 h31.5
  text "Solder to bypass" at 816.77,847.27 h31.5
  text "TSSP out not gate" at 816.77,768.53 h31.5
  text "4.7k" at 1000.03,616.83 h31.5 r90
  text "LFtimeGate RX drop in /  REPLACEMENT BOARD" at 880.99,160.61 h31.5
  text "4k7" at 594.77,98.09 h31.5
BOARD_OUTLINE:
  the board outline again, w1

## Text inside footprints (layer, text, board x,y; h text height)
LED: Top Overlay "+" at 843.27,1509.52 h31.5 r90